# Altium PCB vfd_power_v0.PcbDoc
Units mil, origin at the board's own origin, x right, y up, seen from the top; angles counter-clockwise.
Board outline 7500 x 4000 mil, 2 copper layers (Top Layer, Bottom Layer); 84 components, 41 nets, 235 pads, 22 vias.
Unrouted connection lines stored in the file: 44.
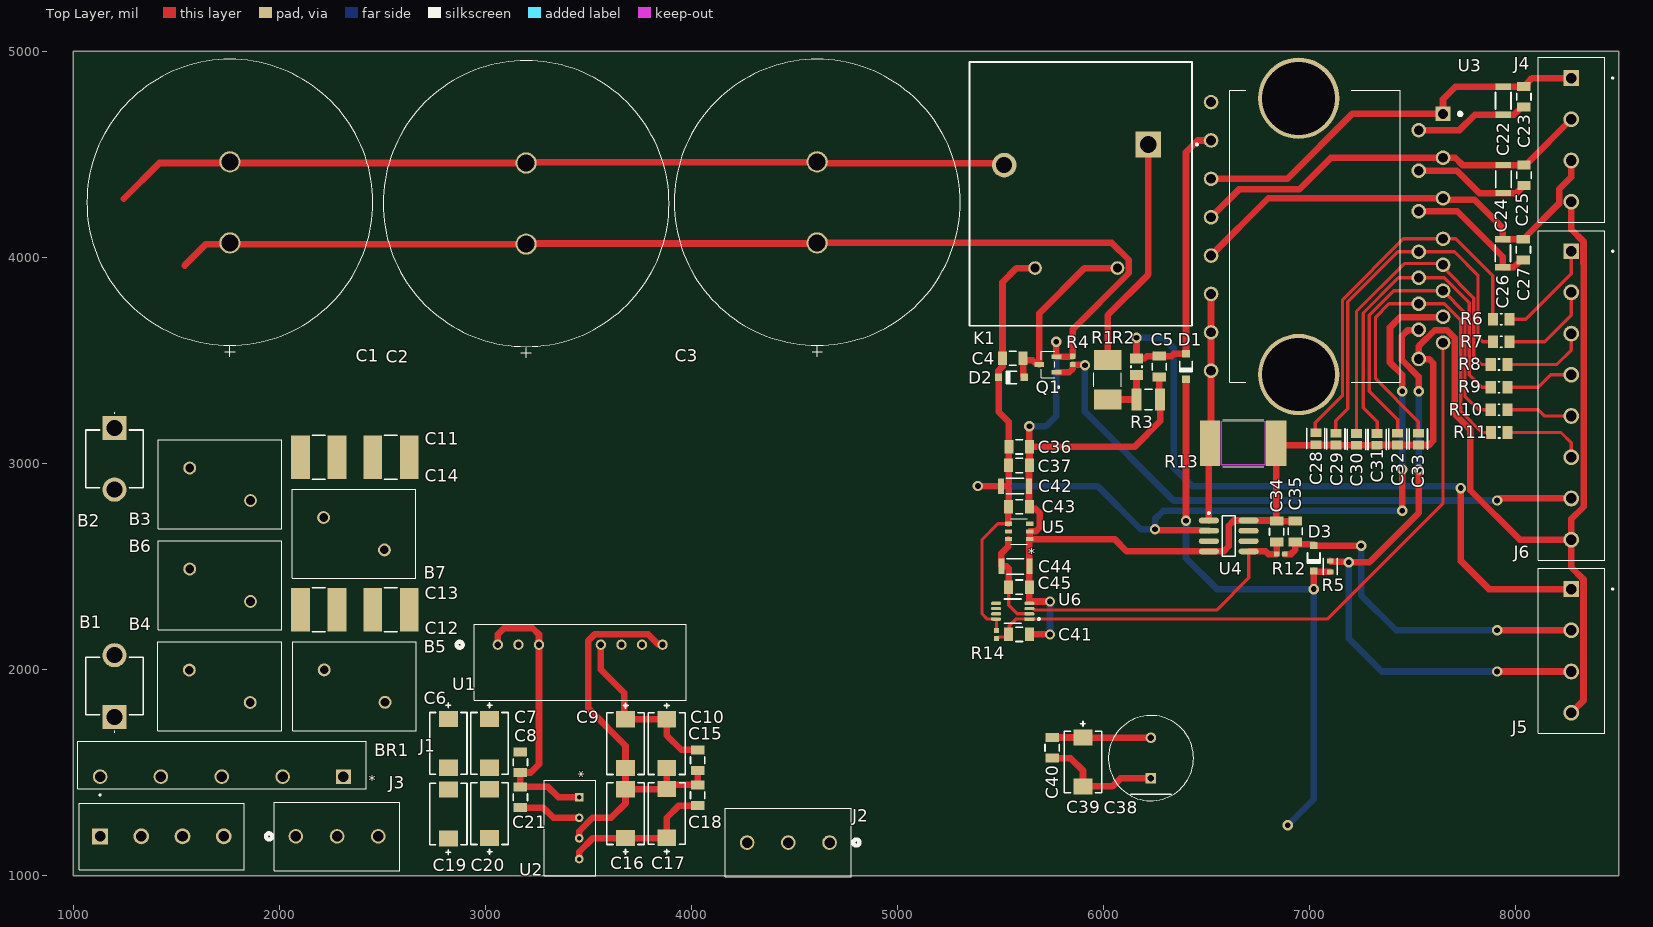
[diagram p0: Top Layer view]
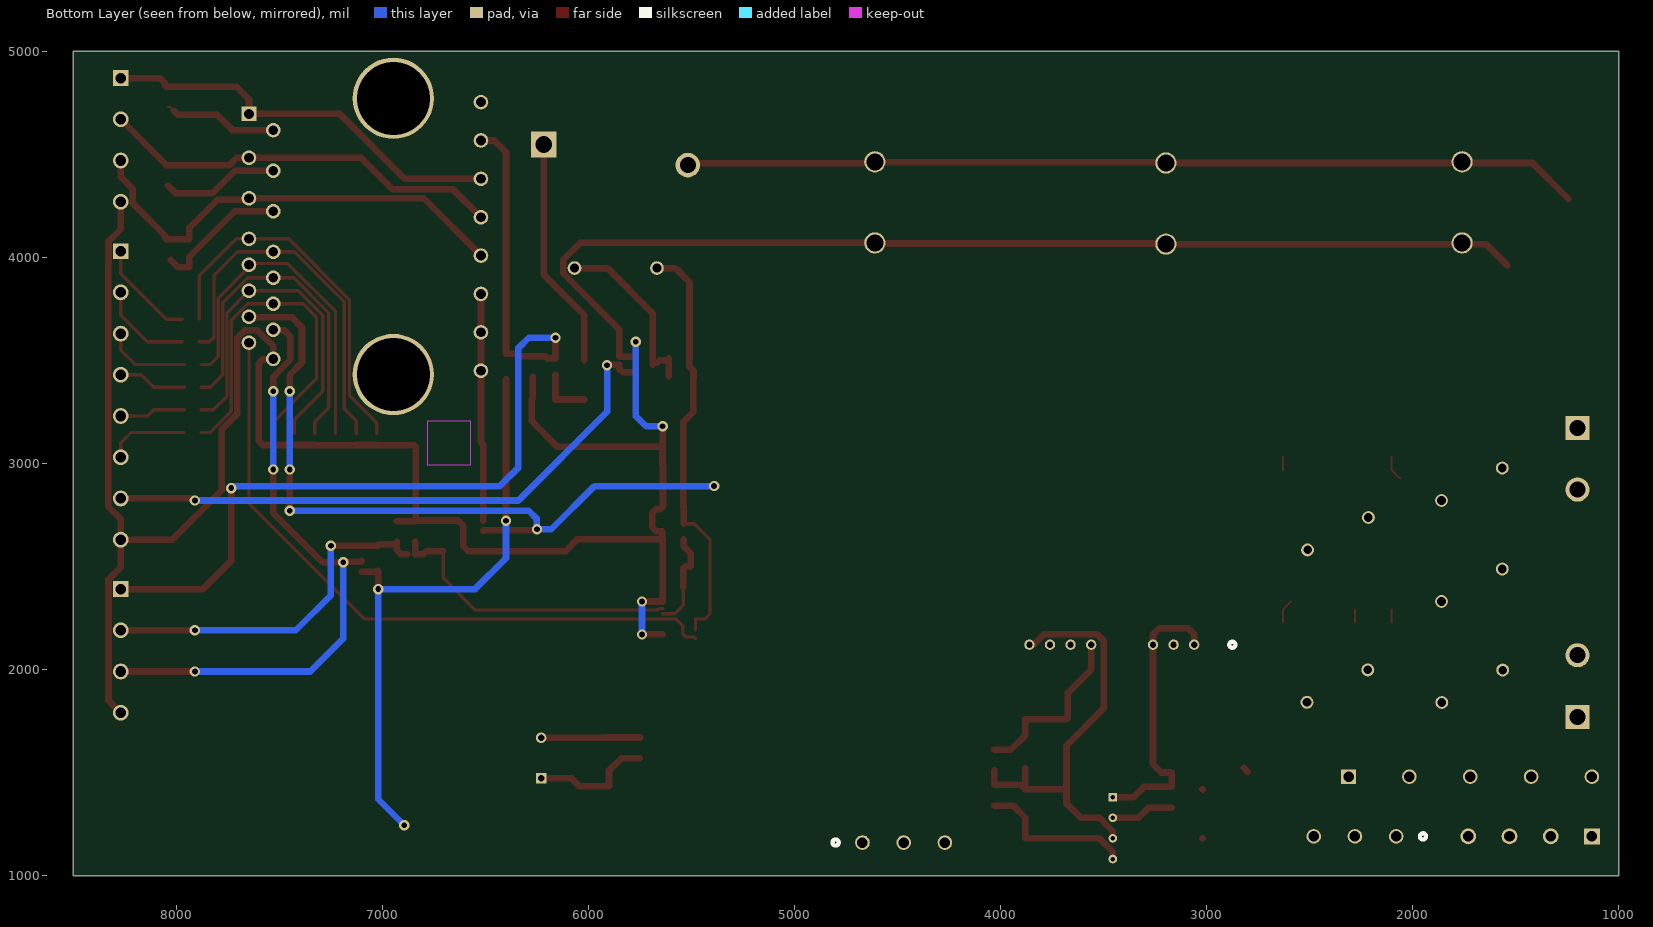
[diagram p1: Bottom Layer view, seen from below]
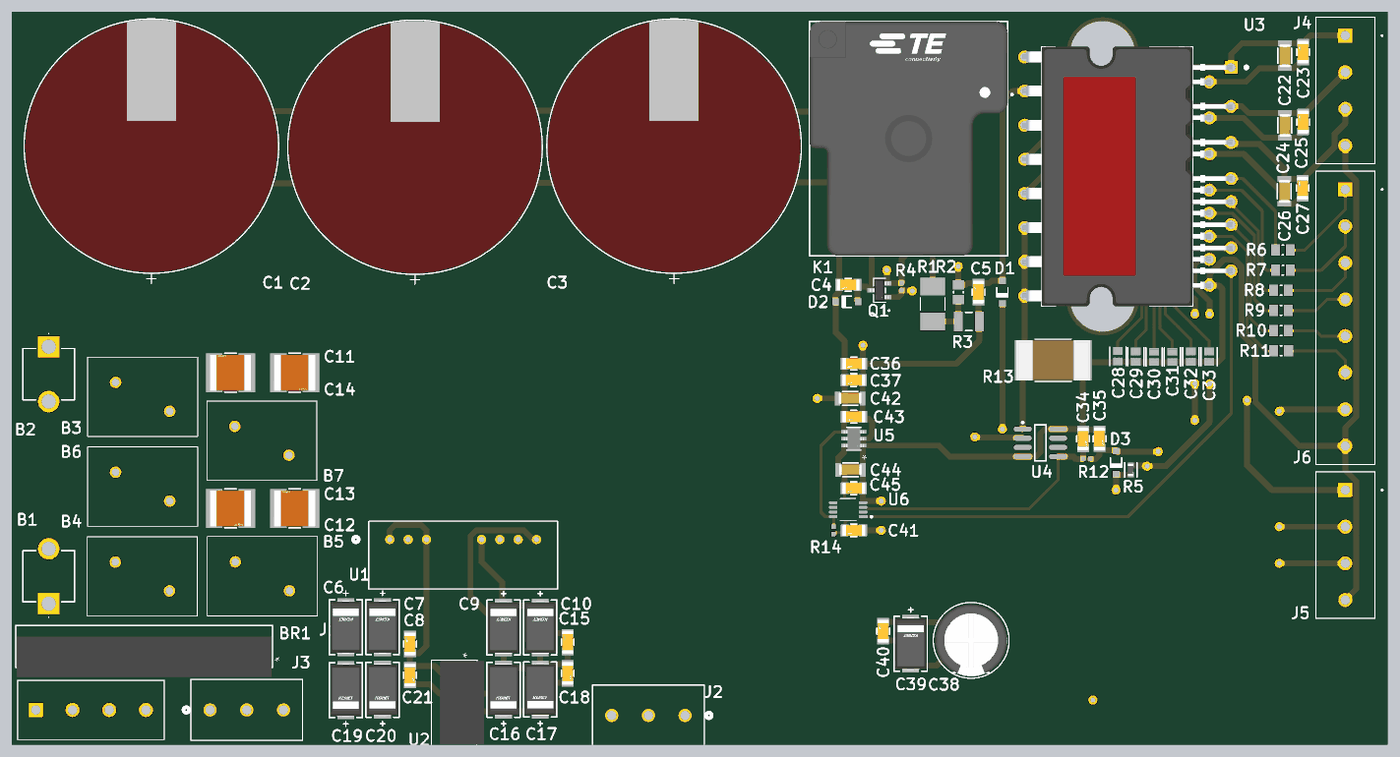
[diagram p2: 3D render of the assembled board from above, using the file's embedded part models]

## Layer stack, top to bottom
Top Solder: solder mask 0.4, Solder Resist, Dk 3.5
Top Layer: signal copper 1.4
Dielectric 1: dielectric 12.6, FR-4, Dk 4.8
Bottom Layer: signal copper 1.4
Bottom Solder: solder mask 0.4, Solder Resist, Dk 3.5

## Board outline
1000,1000 1000,5000 8500,5000 8500,1000

## Design rules (kind name [scope] priority, off if disabled: settings)
Clearance [All] p1: gap=5 ignorepadtopadclearanceinfootprint=FALSE
ComponentClearance [All] p1 off: gap=10 collisioncheckmode=3 verticalgap=10 showdistances=FALSE
DiffPairsRouting [All] p1: maxlimit=13 minlimit=13 mostfreqgap=13 toplayer_minwidth=7.42 toplayer_maxwidth=13 toplayer_prefwidth=7.42 bottomlayer_minwidth=7.42 bottomlayer_maxwidth=13 bottomlayer_prefwidth=7.42 maxuncoupledlength=500
FabricationTestPointUsage TestPointUsage [All] p1: valid=0 allowmultiple=FALSE
FabricationTestpoint Testpoint [All] p1: side=3 testpointundercomponent=TRUE minsize=40 maxsize=100 preferedsize=60 minholesize=20 maxholesize=40 preferedholesize=32 testpointgrid=1 allowsidetop=TRUE allowsidebottom=TRUE usegrid=TRUE gridtolerance=0.01
Height [All] p1 off: minheight=0 maxheight=1000 prefheight=500
HoleSize [All] p1: absolutevalues=TRUE maxlimit=800 minlimit=10 maxpercent=80.000 minpercent=20.000
MatchedLengths MatchedLengths_I210Rx [InNetClass('I210Rx')] p1: tolerance=5 checknetsindiffpair=FALSE checkdiffpairvsdiffpair=TRUE checkxsignals=TRUE checkothers=TRUE
MatchedLengths MatchedLengths_I210Tx [InNetClass('I210Tx')] p2: tolerance=5 checknetsindiffpair=FALSE checkdiffpairvsdiffpair=TRUE checkxsignals=TRUE checkothers=TRUE
MatchedLengths MatchedLengths_mSATARx [InNetClass('mSATARx')] p3: tolerance=25 checknetsindiffpair=FALSE checkdiffpairvsdiffpair=TRUE checkxsignals=TRUE checkothers=TRUE
MatchedLengths MatchedLengths_mSATATx [InNetClass('mSATATx')] p4: tolerance=25 checknetsindiffpair=FALSE checkdiffpairvsdiffpair=TRUE checkxsignals=TRUE checkothers=TRUE
MatchedLengths MatchedLengths_PCIECLK [InNetClass('PCIECLK')] p5: tolerance=25 checknetsindiffpair=FALSE checkdiffpairvsdiffpair=TRUE checkxsignals=TRUE checkothers=TRUE
MatchedLengths MatchedLengths_PCIETx [InNetClass('PCIETx')] p6: tolerance=5 checknetsindiffpair=FALSE checkdiffpairvsdiffpair=TRUE checkxsignals=TRUE checkothers=TRUE
MatchedLengths MatchedLengths_PCIERx [InNetClass('PCIERx')] p7: tolerance=5 checknetsindiffpair=FALSE checkdiffpairvsdiffpair=TRUE checkxsignals=TRUE checkothers=TRUE
MinimumSolderMaskSliver [All] p1: minsoldermaskwidth=5
PlaneConnect [All] p1: planeconnectstyle=Relief reliefexpansion=20 reliefentries=4 reliefconductorwidth=15 reliefairgap=10
PolygonConnect [All] p1: connectstyle=Direct reliefconductorwidth=20 reliefentries=4 polygonreliefangle="90 Angle" airgapwidth=30
RoutingVias [All] p1: holewidth=20 width=40 viastyle="Through Hole" minholewidth=15 minwidth=35 maxholewidth=28 maxwidth=50
SilkToSilkClearance [All] p1: silktosilkclearance=5
SilkToSolderMaskClearance SilkscreenOverComponentPads [IsPad] p1: minsilkscreentomaskgap=5 clearancetoexposedcopper=TRUE
SolderMaskExpansion [All] p1: expansion=4 istentingtop=FALSE
SupplyNets "Schematic Supply Nets_7" [InNet('PGND')] p1: voltage=0.000
SupplyNets "Schematic Supply Nets_6" [InNet('EGND')] p2: voltage=0.000
SupplyNets "Schematic Supply Nets_5" [InNet('15V')] p3: voltage=0.000
SupplyNets "Schematic Supply Nets_1" [InNet('3.3V')] p4: voltage=0.000
SupplyNets "Schematic Supply Nets_3" [InNet('ISO_5V')] p5: voltage=0.000
SupplyNets "Schematic Supply Nets_2" [InNet('ISO_15V')] p6: voltage=0.000
SupplyNets "Schematic Supply Nets" [InNet('GND')] p7: voltage=0.000
Width [All] p1: maxlimit=500 minlimit=5 preferedwidth=10
20 further rules are at their usual default settings.

## Components (designator, comment, footprint, x,y, rotation, side; value= is the part's Value field where it differs from the comment)
B1 "FCLIP1" 01240061H 1200,1770 r90 top
B2 "FCLIP2" 01240061H 1200,3172 r270 top
B3 "470 V" TMOV14RP300E 1712.36,2820 r180 top
B4 "470 V" TMOV14RP300E 1712.36,2487.48 r0 top
B5 "470 V" TMOV14RP300E 2365.16,1997.89 r0 top
B6 "470 V" TMOV14RP300E 1710.64,1839.61 r180 top
B7 "470 V" TMOV14RP300E 2362.36,2580 r180 top
BR1 "GUO40-12NO1" SIP5-GUFP_LTF 2311.1,1480 r180 top
C1 "330 µF" CAP_C30_NCH 1760,4070 r90 top
C2 "330 µF" CAP_C30_NCH 3197.52,4064.19 r90 top
C3 "330 µF" CAP_C30_NCH 4610,4070 r90 top
C4 "0.1 µF" FP-CL31-IPC_C 5559.75,3510 r180 top
C5 "0.1 µF" FP-CL31-IPC_C 6270,3470 r90 top
C6 "47 µF" FP-T521X476M035ATE030-MFG 2820,1641.5 r90 top
C7 "47 µF" FP-T521X476M035ATE030-MFG 3020,1641.5 r90 top
C8 "0.1 µF" FP-CL31-IPC_C 3170,1550 r90 top
C9 "47 µF" FP-T521X476M035ATE030-MFG 3680,1640 r90 top
C10 "47 µF" FP-T521X476M035ATE030-MFG 3880,1640 r90 top
C11 "0.01 µF" FP-GRM55D-0_4-IPC_B 2191.4,3030 r180 top
C12 "0.01 µF" FP-GRM55D-0_4-IPC_B 2541.4,2290 r180 top
C13 "0.01 µF" FP-GRM55D-0_4-IPC_B 2191.4,2290 r0 top
C14 "0.01 µF" FP-GRM55D-0_4-IPC_B 2541.4,3030 r0 top
C15 "0.1 µF" FP-CL31-IPC_C 4030,1559.75 r90 top
C16 "47 µF" FP-T521X476M035ATE030-MFG 3680,1300 r270 top
C17 "47 µF" FP-T521X476M035ATE030-MFG 3880,1301.5 r270 top
C18 "0.1 µF" FP-CL31-IPC_C 4030,1389.75 r270 top
C19 "47 µF" FP-T521X476M035ATE030-MFG 2820,1298.5 r270 top
C20 "47 µF" FP-T521X476M035ATE030-MFG 3020,1300 r270 top
C21 "0.1 µF" FP-CL31-IPC_C 3170,1380 r270 top
C22 "10 µF" FP-CGA5L-0_3-0_1-IPC_B 7939.68,4760 r270 top
C23 "0.1 µF" FP-CL31-IPC_C 8039.68,4779.75 r90 top
C24 "10 µF" FP-CGA5L-0_3-0_1-IPC_B 7940.31,4380 r270 top
C25 "0.1 µF" FP-CL31-IPC_C 8040.31,4397.91 r90 top
C26 "10 µF" FP-CGA5L-0_3-0_1-IPC_B 7937.52,4019.97 r270 top
C27 "0.1 µF" FP-CL31-IPC_C 8037.52,4037.64 r90 top
C28 "CL21C470JBANNND" FP-CL21-IPC_C 7030,3120 r270 top
C29 "CL21C470JBANNND" FP-CL21-IPC_C 7127.52,3117.89 r270 top
C30 "CL21C470JBANNND" FP-CL21-IPC_C 7227.52,3116.46 r270 top
C31 "CL21C470JBANNND" FP-CL21-IPC_C 7327.52,3116.46 r270 top
C32 "CL21C470JBANNND" FP-CL21-IPC_C 7427.52,3117.89 r270 top
C33 "CL21C470JBANNND" FP-CL21-IPC_C 7527.52,3117.89 r270 top
C34 "0.1 µF" FP-CL31-IPC_C 6840,2669.5 r270 top
C35 "0.1 µF" FP-CL31-IPC_C 6930,2669.75 r270 top
C36 "0.1 µF" FP-CL31-IPC_C 5590.25,3080 r180 top
C37 "0.1 µF" FP-CL31-IPC_C 5589.75,2990 r180 top
C38 "220 µF" FP-RAD-TH-D_10_0_5-L_16_1-MFG 6230,1569.68 r90 top
C39 "47 µF" FP-T521X476M035ATE030-MFG 5900,1551.18 r90 top
C40 "0.1 µF" FP-CL31-IPC_C 5750,1619.68 r90 top
C41 "0.1 µF" FP-CL31-IPC_C 5590,2170 r180 top
C42 "10 µF" FP-CGA5L-0_3-0_1-IPC_B 5570,2890 r0 top
C43 "0.1 µF" FP-CL31-IPC_C 5590,2790 r180 top
C44 "10 µF" FP-CGA5L-0_3-0_1-IPC_B 5572.09,2500 r0 top
C45 "0.1 µF" FP-CL31-IPC_C 5589.75,2400 r180 top
D1 "1N4148W-7-F" DIOD-SOD123-2_V 6400,3470 r270 top
D2 "1N4148W-7-F" DIOD-SOD123-2_V 5552.5,3417.5 r180 top
D3 "1N4148W-7-F" DIOD-SOD123-2_V 7020,2540 r270 top
J1 "TB006_-508-04BE" "CUI_TB006 -508-04BE" 1130,1190 r0 top
J2 "TB006-508-03BE" CONN3_TB006-508_CUD 4670,1160 r180 top
J3 "TB006-508-03BE" CONN3_TB006-508_CUD 2080,1190 r0 top
J4 "TB006_-508-04BE" "CUI_TB006 -508-04BE" 8270,4870 r270 top
J5 "TB006_-508-04BE" "CUI_TB006 -508-04BE" 8270,2390 r270 top
J6 "TB006_-508-08BE" "CUI_TB006 -508-08BE" 8270,4030 r270 top
K1 "T9AS1D12-15" FP-T9AS1D12-15-MFG 5889.37,4307.93 r0 top
Q1 "2N7002-TP" SOT-23_MCC 5730,3480 r90 top
R1 "CRS2512-FX-1004ELF" RESC6432X75N 6020,3405.47 r90 top
R2 "1 kΩ" RESC2013X60X30ML20T20 6160,3469.65 r90 top
R3 "10 kΩ" RESC3225X60X45NL20T20 6217.09,3310 r180 top
R4 "10 kΩ" RESC1005X40X25ML05T05 5850,3500 r270 top
R5 "82 kΩ" FP-RC0603-0_55-IPC_C 7100,2500 r270 top
R6 "22 Ω" RESC2013X60X30ML20T20 7929.65,3700 r180 top
R7 "22 Ω" RESC2013X60X30ML20T20 7929.65,3590 r180 top
R8 "22 Ω" RESC2013X60X30ML20T20 7919.65,3480 r180 top
R9 "22 Ω" RESC2013X60X30ML20T20 7919.65,3370 r180 top
R10 "22 Ω" RESC2013X60X30ML20T20 7919.65,3260 r180 top
R11 "22 Ω" RESC2013X60X30ML20T20 7920,3150 r180 top
R12 "10 kΩ" RESC1005X40X25ML05T05 6860,2560 r0 top
R13 "2.5 mΩ" RES_WSLP3921_.002OHM_VIS 6677.52,3097.89 r180 top
R14 "10 kΩ" RESC1005X40X25ML05T05 5480,2169.68 r90 top
U1 "TMR 2-2413WI" TMR2WI-SINGLE_TRP 3060,2120 r0 top
U2 "NKE0305SC" SIP_NKE_11P5X6_MUR 3455,1380 r270 top
U3 "IKCM30F60GDXKMA1" IC_IKCM30F60GDXKMA1 7084.53,4101.67 r270 top
U4 "MAX4080SASA+T" MAXM-S8+2_M 6607.52,2647.89 r0 top
U5 "LT6654BHS6-1.25TRMPBF" TSOT-23_S6_LIT 5590,2670 r180 top
U6 "TLV1702AIDGKR" FP-DGK0008A-IPC_C 5559.26,2282.8 r180 top

## Footprints (in the part's own frame and the unit in brackets; to place one, negate y for a bottom-side part, rotate by r counter-clockwise, add the part's x,y. Pads: shape width x height; smd on the part's side, far side on the other; paste and mask are expansions set on the pad)
01240061H [mm]
  rect 2.97x2.97 hole 1.98: 1(0,0)
  round 2.97 hole 1.98: 2(7.6,0)
  silkscreen extent -1.9,-3.55 7.36,3.55
CAP_C30_NCH [mil]
  round 103 / inner round 60 / far side round 103 hole 83 paste-99999 mask+0: 1(0,0) 2(393.7,0)
  silkscreen extent -552,-694 891,694, body extent -492,-688 887,688, height 1261
CONN3_TB006-508_CUD [mil]
  round 71 / inner round 60 / far side round 71 hole 51 paste-99999 mask+0: 1(0,0) 2(200,0) 3(400,0)
  silkscreen extent -145,-167 505,166
"CUI_TB006 -508-04BE" [mm]
  rect 1.95x1.95 / inner round 1.95 / far side rect 1.95x1.95 hole 1.3: 1(0,0)
  round 1.95 hole 1.3: 2(5.08,0) 3(10.16,0) 4(15.24,0)
  silkscreen extent -2.54,-4.1 17.78,5.2
"CUI_TB006 -508-08BE" [mm]
  rect 1.95x1.95 / inner round 1.95 / far side rect 1.95x1.95 hole 1.3: 1(0,0)
  round 1.95 hole 1.3: 2(5.08,0) 3(10.16,0) 4(15.24,0) 5(20.32,0) 6(25.4,0) 7(30.48,0) 8(35.56,0)
  silkscreen extent -2.54,-4.1 38.1,5.2
DIOD-SOD123-2_V [mm] "SOD123, 2-Leads, Body 2.7x1.55mm, Height 1.45mm"
  rect 0.9x0.95 smd: 1(-1.575,0) 2(1.575,0)
  silkscreen extent -0.64,-0.83 0.64,0.78, body extent -1.35,-0.77 1.35,0.77, height 1.45
FP-CGA5L-0_3-0_1-IPC_B [mm]
  rect 0.756x1.906 smd paste+0 mask+0: 1(-1.725,0) 2(1.725,0)
  silkscreen extent -1.05,-0.95 1.05,0.95, body extent -2.35,-1.2 2.35,1.2, height 0.25
FP-CL21-IPC_C [mil]
  rect 41.52x53.39 smd paste+0 mask+0: 1(-28.57,0) 2(28.57,0)
  silkscreen extent -49,-44 49,44, body extent -53,-32 53,32, height 10
FP-CL31-IPC_C [mil]
  rect 43.52x65.28 smd paste+0 mask+0: 1(-50.25,0) 2(50.25,0)
  silkscreen extent -17,-34 17,34, body extent -76,-38 76,38, height 10
FP-DGK0008A-IPC_C [mm]
  rect 1.257x0.418 smd paste+0 mask+0: 1(-2.051,0.975)
  rrect100% 1.257x0.418 smd paste+0 mask+0: 2(-2.051,0.325) 3(-2.051,-0.325) 4(-2.051,-0.975) 5(2.051,-0.975) 6(2.051,-0.325) 7(2.051,0.325) 8(2.051,0.975)
  silkscreen extent -3.35,-1.5 1.05,1.5, body extent -2.78,-1.6 2.78,1.6, height 0.25
FP-GRM55D-0_4-IPC_B [mil]
  rect 90.64x212.72 smd paste+0 mask+0: 1(-88.6,0) 2(88.6,0)
  silkscreen extent -31,-106 31,106, body extent -144,-116 144,116, height 10
FP-RAD-TH-D_10_0_5-L_16_1-MFG [mm]
  rect 1.3x1.3 hole 0.8 paste-2539.97 mask+0: 1(-2.5,0)
  round 1.3 hole 0.8 paste-2539.97 mask+0: 2(2.5,0)
  silkscreen extent -5.25,-5.25 5.25,5.25, body extent -5.35,-5.35 5.35,5.35, height 0.25
FP-RC0603-0_55-IPC_C [mil]
  rect 25.93x31.97 smd paste+0 mask+0: 1(-26.64,0) 2(26.64,0)
  silkscreen extent -40,-33 40,33, body extent -44,-22 44,22, height 10
FP-T9AS1D12-15-MFG [mm]
  rect 3.16x3.16 hole 2.06 paste-2539.97 mask+0: 1(8.335,6.095)
  round 3.03 hole 1.98 paste-2539.97 mask+0: 2(-9.445,3.555)
  round 1.69 hole 1.09 paste-2539.97 mask+0: 3(-5.635,-9.145) 4(4.525,-9.145)
  silkscreen extent -13.71,-16.25 14.44,16.25, body extent -13.81,-16.35 13.81,16.35, height 0.25
FP-T521X476M035ATE030-MFG [mm]
  rect 1.99x2.33 smd paste+0 mask+0: 1(-3.01,0) 2(3.01,0)
  silkscreen extent -3.8,-2.3 5,2.3, body extent -4.13,-2.42 4.13,2.42, height 0.25
IC_IKCM30F60GDXKMA1 [mm]
  rect 1.8x1.8 / inner round 1.8 / far side rect 1.8x1.8 hole 1.2: 1(-15.1,14.3)
  round 1.8 hole 1.2: 2(-13.1,11.3) 3(-9.7,14.3) 4(-8.1,11.3) 5(-4.7,14.3) 6(-3.1,11.3) 7(0.3,14.3) 8(1.9,11.3) 9(3.5,14.3) 10(5.1,11.3) 11(6.7,14.3) 12(8.3,11.3) 13(9.9,14.3) 14(11.5,11.3) 15(13.1,14.3) 16(15.1,11.3) 17(16.555,-14.3) 18(11.825,-14.3) 19(7.095,-14.3) 20(2.365,-14.3) 21(-2.365,-14.3) 22(-7.095,-14.3) 23(-11.825,-14.3) 24(-16.555,-14.3)
  round 10.016 hole 9 mask+0: 25(-17.025,-3.5) 26(17.025,-3.5)
  silkscreen extent -18,-12 18,16.6, body extent -18,-14.55 18,14.55, height 5.6
MAXM-S8+2_M [mm] "SOIC, 8-Leads, Body 4.90x3.90mm, Pitch 1.27mm, IPC Low Density"
  oval 2.5x0.7 smd: 1(-2.45,1.905) 2(-2.45,0.635) 3(-2.45,-0.635) 4(-2.45,-1.905) 5(2.45,-1.905) 6(2.45,-0.635) 7(2.45,0.635) 8(2.45,1.905)
  silkscreen extent -2.57,-2.5 0.8,2.93, body extent -2,-2.5 2,2.5, height 1.75
RES_WSLP3921_.002OHM_VIS [mil]
  rect 98x220 smd paste+0 mask+0: 1(-161,0) 2(161,0)
  Top Layer keep-out region: -107,-106 -107,106 105,106 105,-106
  Keep-Out Layer region: -105.5,-105.5 -105.5,105.5 105.5,105.5 105.5,-105.5
  silkscreen extent -100,-115 100,115, body extent -202,-110 202,110, height 47
RESC1005X40X25ML05T05 [mm] "Chip Resistor, 2-Leads, Body 1.00x0.50mm, IPC Low Density"
  rect 0.65x0.65 smd: 1(-0.5,0) 2(0.5,0)
  body extent -0.53,-0.27 0.53,0.28, height 0.4
RESC2013X60X30ML20T20 [mm] "Chip Resistor, 2-Leads, Body 2.00x1.25mm, IPC Low Density"
  rect 1.25x1.55 smd: 1(-1.025,0) 2(1.025,0)
  silkscreen extent -0.1,-0.67 0.1,0.67, body extent -1.1,-0.72 1.1,0.72, height 0.6
RESC3225X60X45NL20T20 [mm] "Chip Resistor, 2-Leads, Body 3.20x2.50mm, IPC Medium Density"
  rect 1.2x2.7 smd: 1(-1.45,0) 2(1.45,0)
  silkscreen extent -0.45,-1.25 0.45,1.25, body extent -1.7,-1.35 1.7,1.35, height 0.6
RESC6432X75N [mm]
  rect 2.46x3.42 smd: 1(-2.425,0) 2(2.425,0)
  silkscreen extent -0.87,-1.7 0.87,1.7
SIP5-GUFP_LTF [mil]
  rect 71x71 / inner round 60 / far side rect 71x71 hole 51 paste-99999 mask+0: 1(0,0)
  round 71 / inner round 60 / far side round 71 hole 51 paste-99999 mask+0: 2(295.28,0) 3(590.55,0) 4(885.83,0) 5(1181.1,0)
  silkscreen extent -109,-171 1291,59, body extent -104,-110 1286,110, height 1142
SIP_NKE_11P5X6_MUR [mil]
  rect 42x42 / inner round 60 / far side rect 42x42 hole 22 paste-99999 mask+0: 1(0,0)
  round 42 / inner round 60 / far side round 42 hole 22 paste-99999 mask+0: 2(100,0) 3(200,0) 4(300,0)
  silkscreen extent -82,-168 382,82, body extent -77,-120 377,120, height 304
SOT-23_MCC [mil]
  rect 22x48 smd paste+0 mask+0: 1(-37.5,-42) 2(37.5,-42) 3(0,42)
  silkscreen extent -115,-57 65,33, body extent -60,-52 60,52, height 49
TMOV14RP300E [mm]
  round 1.59 hole 1.06: 1(-3.75,0) 2(3.75,-4)
  silkscreen extent -7.62,-7.5 7.62,3.5
TMR2WI-SINGLE_TRP [mil]
  round 50 / inner round 60 / far side round 50 hole 30 paste-99999 mask+0: 1(0,0) 2(100,0) 3(200,0) 6(500,0) 7(600,0) 8(700,0) 9(800,0)
  silkscreen extent -200,-270 915,100
TSOT-23_S6_LIT [mil]
  rect 34.5x20 smd paste+0 mask+0: 1(-51.75,37.4) 2(-51.75,0) 3(-51.75,-37.4) 4(51.75,-37.4) 5(51.75,0) 6(51.75,37.4)
  silkscreen extent -40,-62 40,62, body extent -55,-57 55,57, height 39

## Part data
B1 B2: library part 01240061H, "Fuse Clip 40 A - 1 Circuit Cartridge Through Hole", Manufacturer_Name=LITTELFUSE, Mouser Part Number=576-01240061H, Datasheet Link=https://www.littelfuse.com/media?resourcetype=datasheets&itemid=281b065a-d81e-4e26-9035-84e73d4bb028&filename=littelfuse-fuse-clip-124-datasheet.pdf, Geometry.Height=10.67mm, Manufacturer_Part_Number=01240061H, Mouser Price/Stock=https://www.mouser.co.uk/ProductDetail/Littelfuse/01240061H?qs=81r%252BiQLm7BSgqEC6g%252BUS9Q%3D%3D
B3 B4 B5 B6 B7: library part TMOV14RP300E, "Var MOV 300VAC/385VDC 6000A 517V Thru-Hole Radial Bulk", Manufacturer_Name=LITTELFUSE, Mouser Part Number=576-TMOV14RP300E, Datasheet Link=https://www.littelfuse.com/~/media/electronics/datasheets/varistors/littelfuse_varistor_tmov_itmov_datasheet.pdf.pdf, Geometry.Height=22mm, Manufacturer_Part_Number=TMOV14RP300E, Mouser Price/Stock=https://www.mouser.co.uk/ProductDetail/Littelfuse/TMOV14RP300E?qs=nXjUL3qLHyUFvQrdNOF75Q%3D%3D
BR1: "No Description Available", Mfr_Name="Littelfuse Inc", RefDes=RefDes, Type=Type
C1 C2 C3: library part LGW2G331MELC30, "400V", Mfr_Name=Nichicon
C4 C5 C8 C15 C18 C21 C23 C25 C27 C34 C35 C36 C37 C40 C41 C43 C45: library part CMP-13271-001731-1, "Cap Ceramic 100nF 50V X7R ±10% SMD 1206 +125°C Embossed T/R", Capacitance=100nF, Case/Package=1206, Dielectric=X7R, Max Operating Temperature=125°C, Min Operating Temperature=-55°C, Package Quantity=15000, Tolerance=10%, Voltage=50V, Depth=1.6mm, Height=0.85mm, Lead Free="Lead Free", Length=3.2mm, Mount="Surface Mount", Packaging="Tape and Reel", Radiation Hardening=No, Thickness=0.037inch, Voltage Rating=50V, Voltage Rating (DC)=50V, Width=0.063inch
C6 C7 C9 C10 C16 C17 C19 C20 C39: library part CMP-03016-000019-1, "CAP TANT POLY 47UF 35V 2917 /  / 35V", Capacitance=47uF, Case Code (Imperial)=2917, Case Code (Metric)=7343, ESR (Equivalent Series Resistance)=30mR, Max Operating Temperature=125°C, Min Operating Temperature=-55°C, Package Quantity=1, Tolerance=20%, Voltage Rating=35V, Case/Package=2917, Construction=Flat, Depth=4.3mm, Dissipation Factor=10%, Features="General Purpose", Height=4mm, Height - Seated (Max)=0.169inch, Length=7.3mm, Life (Hours)=2000Hour, Mount="Surface Mount", Number of Pins=2, Packaging="Tape and Reel", Polarity=Polar, REACH SVHC="No SVHC", RoHS Compliant=Yes, Series="KO-CAP T521", Termination=SMD/SMT, Voltage Rating (DC)=35V, Width=4.3mm
C11 C12 C13 C14: library part CMP-06035-012355-1, "Chip Multilayer Ceramic Capacitors for General Purpose, 2220, 10000pF, U2J, -750ppm/°C, 5%, 1kV", Capacitance=10nF, Case Code (Imperial)=2220, Case Code (Metric)=5750, Dielectric=U2J, Max Operating Temperature=125°C, Min Operating Temperature=-55°C, Package Quantity=1000, Tolerance=5%, Voltage Rating=1kV, Case/Package=2220, Height=2mm, Length=0.224inch, Mount="Surface Mount", Packaging="Tape and Reel", Termination=SMD/SMT, Thickness=0.087inch, Voltage Rating (DC)=1kV, Width=0.197inch
C22 C24 C26 C42 C44: library part CMP-08246-000748-1, "Cap Ceramic 10uF 25V X7R 10% Pad SMD 1206 +125°C Automotive T/R", Capacitance=10uF, Case Code (Imperial)=1206, Case Code (Metric)=3216, Dielectric=X7R, Max Operating Temperature=125°C, Min Operating Temperature=-55°C, Package Quantity=2000, Ratings=AEC-Q200, Tolerance=10%, Voltage Rating=25V, Case/Package=1206, Composition=Ceramic, Depth=1.6mm, Height=1.6mm, Length=3.2mm, Mount="Surface Mount", Packaging="Tape and Reel", Termination=SMD/SMT, Thickness=0.071inch, Voltage Rating (DC)=25V, Weight=0.000571oz, Width=1.6mm
C28 C29 C30 C31 C32 C33: library part CMP-13271-002187-1, "CL21 Series 0805 47pF 50V ±5% Tolerance C0G Multilayer Ceramic Chip Capacitor", Capacitance=47pF, Case/Package=0805, Dielectric=C0G, Max Operating Temperature=125°C, Min Operating Temperature=-55°C, Package Quantity=10000, Temperature Coefficient=300ppm/°C, Tolerance=5%, Voltage=50V, Depth=1.25mm, Height=0.65mm, Length=2mm, Material=Ceramic, Mount="Surface Mount", Packaging="Tape and Reel", Radiation Hardening=No, Thickness=0.03inch, Voltage Rating=50V, Voltage Rating (DC)=50V, Width=0.049inch
C38: library part CMP-05427-000403-1, "Aluminum Electrolytic Capacitors (Radial Lead Type) 220uF ±20% 50V", Capacitance=220uF, Case/Package=Radial, ESR (Equivalent Series Resistance)=30mR, Max Operating Temperature=105°C, Min Operating Temperature=-40°C, Package Quantity=1, Ripple Current=1.65A, Tolerance=20%, Voltage Rating=50V, Contact Plating=Tin, Diameter=10mm, Features="General Purpose", Height=16mm, Height - Seated (Max)=0.689inch, Impedance=30mR, Lead Diameter=0.6mm, Lead Free="Lead Free", Lead Pitch=5mm, Length=16mm, Life (Hours)=8000Hour, Mount="Through Hole", Number of Pins=2, Packaging="Ammo Pack", Radiation Hardening=No, REACH SVHC="No SVHC", RoHS Compliant=Yes, Series=FR, Termination=Radial, Voltage Rating (DC)=50V
D1 D2 D3: library part CMP-2000-04932-2, "Fast Switching Diode, 100 V, 0.15 A, -65 to 150 degC, 2-Pin?SOD123, RoHS, Tape and Reel", If - Forward Current=0.15A, Ir - Reverse Current=1uA, Manufacturer=DiodesIncorporated, Max Surge Current=2A, Maximum Operating Temperature=+150C, Minimum Operating Temperature=-65C, Operating Temperature Range=-65Cto+150C, Package / Case=SOD-123, Package Reference=SOD123-2, Peak Reverse Voltage=100V, Vf - Forward Voltage=1.25V, Brand=DiodesIncorporated, Configuration=Single, Datasheet URL=http://www.farnell.com/datasheets/1915529.pdf, Datasheet Version="Rev. 24-2, 10/2013", Factory Pack Quantity=3000, Height=1.25mm, Length=2.85mm, Manufacturer URL=http://www.diodes.com/, Mounting Style=SMD/SMT, Package URL=http://www.diodes.com/datasheets/ds18004.pdf, Packaging=Reel, Product=SwitchingDiodes, Product Category=Diodes-GeneralPurpose,Power,Switching, Recovery Time=4ns, RoHS=True, Series=1N4148, Type=SwitchingDiode, Unit Weight=0.000353oz, Width=1.7mm
J1 J4 J5: "2~24 Poles, Screw Type, Horizontal, 5.08 Pitch, 26~14 (AWG), Terminal Block Connector", Package=None, Availability="In Stock", Check_prices=https://www.snapeda.com/parts/TB006%20-508-04BE/CUI+Devices/view-part/?ref=eda, CUI_purchase_URL=https://www.cuidevices.com/product/interconnect/connectors/terminal-blocks/tb006-508-series?utm_source=snapeda.com&utm_medium=referral&utm_campaign=snapedaBOM, MF="CUI Devices", MP="TB006 -508-04BE", Price=None, Purchase-URL="https://pricing.snapeda.com/search/part/TB006 -508-04BE/?ref=eda", SnapEDA_Link=https://www.snapeda.com/parts/TB006%20-508-04BE/CUI+Devices/view-part/?ref=snap
J2 J3: "No Description Available", Mfr_Name="Same Sky", RefDes=RefDes, Type="Wire to Board"
J6 R1: Package=None, Availability=Unavailable, Price=None
  J6: MF="{'manufacturer': u'CUI Devices'}", MP="TB006 -508-08BE"
  R1: MP=CRS2512-FX-1004ELF
K1: library part CMP-03395-000224-1, "RELAY GEN PURPOSE SPST 30A 15V", Coil Current=67mA, Coil Power=1W, Coil Resistance=225R, Coil Voltage (DC)=15V, Contact Current Rating=30A, Contact Voltage Rating (AC)=277V, Max Operating Temperature=85°C, Min Operating Temperature=-55°C, Package Quantity=50, Coil Type=Non-Latching, Contact Material=Silver, Depth=27.43mm, ELV=Non-Compliant, Height=20.4mm, Lead Free="Lead Free", Length=32.5mm, Max Voltage Rating (AC)=277V, Mount="Through Hole", Number of Pins=4, Operate Time=15ms, Packaging=Bulk, Power Consumption=1W, Radiation Hardening=No, Relay Type="General Purpose", Release Time=15ms, RoHS Compliant=Yes, Series=T9A, Termination=PCB, Throw Configuration=SPST, Weight=0.918oz, Width=27.4mm
Q1: "No Description Available", Mfr_Name=MCC, Type=Transistors
R2: library part CMP-2001-04656-1, "±5%", Manufacturer="KOA Speer", Part Number=RK73B2ATTD102J
R3: library part CMP-2005-01993-1, "±1%, 0.5W", Manufacturer="Vishay Dale", Part Number=CRCW121010K0FKEA
R4 R12 R14: library part CMP-2002-01181-1, "±5%", Manufacturer=Panasonic, Part Number=ERT-J0EM103J
R5: library part CMP-03412-048229-1, "RES 82K OHM 5% 1/10W 0603", Case Code (Imperial)=0603, Case Code (Metric)=1608, Max Operating Temperature=155°C, Max Power Dissipation=100mW, Min Operating Temperature=-55°C, Package Quantity=1, Resistance=82kR, Resistance Tolerance=5%, Resistor Type="Thick Film", Temperature Coefficient=100ppm/°C, Voltage Rating=75V, Voltage Rating (DC)=50V, Case/Package=0603, Construction=Rectangular, Depth=0.8mm, Features="Moisture Resistant", Height=0.022inch, Lead Free="Lead Free", Length=0.063inch, Military Standard=Not, Number of Pins=2, Number of Terminations=2, Packaging="Tape and Reel", Power Rating=100mW, REACH SVHC="No SVHC", RoHS Compliant=Yes, Series=RC, Size Code=0603, Termination=SMD/SMT, Tolerance=5%, Weight=7.1E-05oz, Width=0.8mm
R6 R7 R8 R9 R10 R11: library part CMP-2001-04578-1, Manufacturer="KOA Speer", Part Number=RK73B2ATTD220J
R13: library part WSLP39212L500FEA, "±1%, 5W", Mfr_Name=Vishay
U1: library part CMP-01539-55835505-1, "TMR 2-2413WI Module DC-DC 24VIN 1-OUT 15V 135A 2W 7-Pin SIP", Case/Package=SIP, Isolation Voltage=1.5kV, Max Operating Temperature=85°C, Min Operating Temperature=-40°C, Nominal Input Voltage=24V, Output Current=135A, Output Power=2W, Output Voltage=15V, Depth=9.3mm, Isolation=Isolated, Length=26mm, Mount="Through Hole", NexarPartId=55835505, Number of Outputs=1, Number of Pins=7, Radiation Hardening=No, RoHS=Compliant
U2: "No Description Available", Mfr_Name=Murata, RefDes=RefDes, Type=Type
U3: "Fully isolated Dual In-Line molded module", Package="PowerDIP-24 Infineon", Availability="In Stock", Check_prices=https://www.snapeda.com/parts/IKCM30F60GDXKMA1/Infineon+Technologies/view-part/?ref=eda, MF="Infineon Technologies", MP=IKCM30F60GDXKMA1, Price=None, Purchase-URL=https://pricing.snapeda.com/search?q=IKCM30F60GDXKMA1&ref=eda, SnapEDA_Link=https://www.snapeda.com/parts/IKCM30F60GDXKMA1/Infineon+Technologies/view-part/?ref=snap
U4: library part CMP-0252-00176-1, "76 V, High-Side, Uni-directional Current-Sense Amplifier, 60 V / V Gain, -40 to 125 degC, 8-Pin SOIC (S8+2), Pb-Free, Tape and Reel", Bi-Dir. Curr. Sense=No, Code_JEDEC=MS012, ComponentLink1Description="Manufacturer URL", ComponentLink1URL=http://www.maximintegrated.com/, ComponentLink2Description=Datasheet, ComponentLink2URL=http://datasheets.maximintegrated.com/en/ds/MAX4080-MAX4081.pdf, ComponentLink3Description="Package Specification", ComponentLink3URL=http://pdfserv.maximintegrated.com/package_dwgs/21-0041.PDF, DatasheetVersion="Rev. 4", Gain="5 V/V, 20 V/V ,60 V/V", Industry Qualified="Automotive - AECQ100, Automotive - General", Mounting Technology="Surface Mount", PackageDescription="8-Pin Small-Outline IC, Narrow (0.15in) (S8+2), Body 4.90 x 3.90 mm, Pitch 1.27 mm", PackageReference=S8+2, PackageVersion="Rev. D, 10/2012", PartNumber=MAX4080SASA+T
U5: "No Description Available", Mfr_Name="Analog Devices Inc", RefDes=RefDes, Type=Type
U6: library part CMP-04896-000101-1, "IC COMPARATOR DUAL 8VSSOP", Case/Package=VSSOP, Input Bias Current=15nA, Input Offset Voltage (Vos)=3.5mV, Max Dual Supply Voltage=18V, Max Operating Temperature=125°C, Max Supply Voltage=36V, Min Dual Supply Voltage=1.1V, Min Operating Temperature=-40°C, Min Supply Voltage=2.2V, Nominal Supply Current=55uA, Output Current=20mA, Package Quantity=2500, Power Supply Rejection Ratio (PSRR)=-96.48dB, Quiescent Current=75uA, Contact Plating=Gold, Lead Free="Lead Free", Max Input Current=15nA, Mount="Surface Mount", Number of Channels=2, Number of Elements=2, Number of Pins=8, Packaging="Tape and Reel", Propagation Delay=560ns, REACH SVHC="No SVHC", Response Time=780ns, RoHS Compliant=Yes, Series=-, Type="General Purpose"

## Via types
v1: diameter 50, hole 28, Top Layer to Bottom Layer, 22 vias

## Nets (pads, with @x,y where several pads share a name; then routed paths per layer and width w, separated by ;. In a path a pad name is that pad's centre, name@x,y a point inside that pad or via, vN(x,y) a via of type N, cw(c..) or ccw(c..) an arc to the next point about the centre after c; other vN are vias at no path point)
3.3V: C19.2 C20.2 C21.2 J3.1 U2.2 | length 307.7
  Top Layer w32: C20.2@3018.5,1180 C20.2 ; C21.2 3280.25,1329.75 3330,1280 U2.2
15V: C6.2 C7.2 C8.2 J3.3 U1.2
+_VIN: B1.1 BR1.5
EGND: B7.1 C14.2 | length 61
  Top Layer w10: C14.2@2630,2968.96 C14.2
GND: C6.1 C7.1 C8.1 C19.1 C20.1 C21.1 J3.2 U1.1 U1.3 U2.1 | length 1417.2
  Top Layer w32: C6.1@2800,1502.99 C6.1 ; C20.1@3018.5,1417.01 C20.1 ; U1.1 3060,2170 3090,2200 3230,2200 3260,2170 U1.3 3260,1540 3219.75,1499.75 C8.1 C21.1 3304.25,1430.25 3354.5,1380 U2.1
HIN(U): C28.1 R6.2 U3.7 | length 1841
  Top Layer w16: C28.1@7027.52,3145.03 7027.52,3197.52 7160,3330 7160,3795.36 7454.5,4089.85 U3.7 7661.29,4089.85 7710.15,4089.85 7889.29,3910.71 R6.2@7889.29,3700.41
HIN(V): C29.1 R7.2 U3.8 | length 1823.5
  Top Layer w16: C29.1 7127.52,3207.52 7185,3265 7185,3785 7426.86,4026.86 U3.8 7703.14,4026.86 7816.96,3913.04 7816.96,3613.05 7840,3590 R7.2
HIN(W): C30.1 R8.2 U3.9 | length 1717.1
  Top Layer w16: C30.1 7227.52,3737.52 7460,3970 7641.39,3970 U3.9 7647.52,3951.08 7795.96,3802.65 7795.96,3519.04 7835,3480 R8.2
ISO_5V: C16.2 C17.2 C18.2 D1.2 D3.2 J2.1 R5.2 U2.4 | length 3677.5
  Top Layer w32: U2.4 3455,1115 3521.5,1181.5 C16.2 C17.2@3880,1181.5 ; C17.2 3880,1280 3939.5,1339.5 C18.2 ; v1(6400,2722.25) D1.2 ; v1(7020,2390) D3.2 7024.63,2473.36 R5.2
  Bottom Layer w32: v1(6400,2722.25) 6400,2540 6550,2390 v1(7020,2390) 7020,1370 v1(6893.94,1243.94)
ISO_15V: C4.2 C9.2 C10.2 C15.2 C36.2 C37.2 C38.2 C39.2 C40.2 C42.1 C43.2 D2.2 J2.3 K1.3 R14.2 U1.6 U3.13 U4.2 U5.4 U6.8 | length 7212.5
  Top Layer w10: U3.13@7645.62,3710 U3.13
  Top Layer w16: R14.2 5480,2242.93 U6.8 5435.59,2244.41 5410,2270 5410,2630 5487.4,2707.4 U5.4
  Top Layer w32: U1.6 3560,2000 3673.31,1886.69 3673.31,1765.2 C9.2 C10.2 3880,1680 3950,1610 C15.2 ; v1(5390,2890) C42.1 5530,2890 ; U5.4 5538.25,2788.5 C43.2 5539.75,2880.25 5530,2890 ; K1.3 5577.89,3947.89 5509.5,3879.5 C4.2 5510,3509.5 5510,3470 5490,3450 5490,3417.99 D2.2 5490.49,3251.16 5540,3201.65 C36.2 5540,2990.5 C37.2 5540,2989.5 5540,2900 5530,2890 ; C40.2@5749.75,1669.68 C40.2 5899.75,1669.93 C39.2 C39.2@5906.69,1669.68 ; C39.2@5906.69,1668.11 C38.2 ; v1(6250,2680) 6253.75,2676.25 6507.71,2676.25 U4.2 ; v1(7450,2770) v1(7450,2970) ; v1(7450,3350) 7450,3430 7390,3490 7390,3660 7440,3710 U3.13@7645.62,3710
  Bottom Layer w32: v1(5390,2890) 5970,2890 6180,2680 v1(6250,2680) 6250,2730 6290,2770 v1(7450,2770) ; v1(7450,2970) v1(7450,3350)
ITRIP: C41.2 R14.1 U3.15 U6.1 | length 3241.6
  Top Layer w16: R14.1 5484.8,2154.8 5491.17,2154.8 5494.17,2157.8 5527.55,2157.8 C41.2 5541.78,2172.03 5541.78,2211.78 5574.41,2244.41 U6.1 7084.41,2244.41 7647.52,2807.52 U3.15
ITRIP+: C34.2 R12.1 U4.5 U6.3 | length 1461.3
  Top Layer w16: U6.3 5640.09,2295.5 5656.72,2295.5 5660.99,2291.23 5665.3,2291.23 5668.07,2288.46 6548.46,2288.46 6703.98,2443.98 U4.5
  Top Layer w32: U4.5 6787.11,2572.89 6800,2560 R12.1 6840.32,2618.93 C34.2
LIN(U): C31.1 R9.2 U3.10 | length 1727.3
  Top Layer w16: C31.1 7327.52,3202.48 7260,3270 7260,3730 7430.88,3900.88 U3.10 7653.02,3900.88 7774.96,3778.95 7774.96,3430.04 7835,3370 R9.2
LIN(V): C32.1 R10.2 U3.11 | length 1745.5
  Top Layer w16: C32.1 7427.52,3212.48 7290,3350 7290,3720 7407.89,3837.89 U3.11 7753.96,3731.45 7753.96,3326.04 7820,3260 R10.2
LIN(W): C33.1 R11.2 U3.12 | length 1754.1
  Top Layer w16: C33.1 7527.52,3202.48 7320,3410 7320,3710 7384.89,3774.89 U3.12 7653.02,3774.89 7732.96,3694.96 7732.96,3252.4 7835.35,3150 R11.2
NetB2_1: B2.1 B3.2 C1.2 C2.2 C3.2 K1.2 | length 4360.2
  Top Layer w10: B2.1@1200,3140.79 B2.1@1204.72,3145.51
  Top Layer w32: 1244.72,4284.72 1417.89,4457.89 C2.2 3200.43,4460.79 4607.09,4460.79 C3.2 4617.91,4455.79 5509.62,4455.79 K1.2
NetC4_1: C4.1 D2.1 K1.4 Q1.3 | length 904.4
  Top Layer w10: D2.1@5610,3422.01 D2.1 ; C4.1 C4.1@5620,3500 ; Q1.3@5669,3487.76 5669,3486 5675,3480 Q1.3
  Top Layer w32: D2.1@5610,3422.01 C4.1 ; C4.1@5620,3500 5656.76,3500 Q1.3@5669,3487.76 ; Q1.3 5688,3728 5907.89,3947.89 K1.4
NetC44_1: C44.1 C45.2 U5.6 U6.2 | length 483.3
  Top Layer w16: C45.2 5539.5,2310.5 5580,2270 U6.2
  Top Layer w32: U5.6 5538.25,2598.25 5504.17,2564.17 C44.1 5530,2500 5539.5,2490.5 C45.2
NetK1_1: K1.1 R1.2 | length 1128.8
  Top Layer w32: R1.2 6020,3720 6217.52,3917.52 K1.1
NetR1_1: R1.1 R2.1 R3.2 | length 259.3
  Top Layer w32: R1.1 R3.2 R2.1
NU_NV_NW_RS+: R13.2 U3.17 U3.18 U3.19 U4.1 | length 1103.8
  Top Layer w32: U4.1 6511.07,3092.43 R13.2 6521.54,3102.9 U3.17 U3.18 U3.19
OUT0: J6.1 R6.1 | length 501.1
  Top Layer w16: R6.1 8050,3700 8270,3920 J6.1
OUT1: J6.2 R7.1 | length 463.8
  Top Layer w16: R7.1 8140,3590 8270,3720 J6.2
OUT2: J6.3 R8.1 | length 419
  Top Layer w16: R8.1 8200,3480 8270,3550 J6.3
OUT3: J6.4 R9.1 | length 334.9
  Top Layer w16: R9.1 8110,3370 8170,3430 J6.4
OUT4: J6.5 R10.1 | length 322.4
  Top Layer w16: R10.1 8110,3260 8140,3230 J6.5
OUT5: J6.6 R11.1 | length 400.4
  Top Layer w16: R11.1 8220,3150 8270,3100 J6.6
OUT6: J6.7 Q1.1 R4.2 | length 2936.4
  Top Layer w32: Q1.1 5833.84,3442.5 5850,3458.66 R4.2 5851.88,3478.44 5907.65,3478.44 v1(5909.53,3476.56) ; v1(7910,2820) 7914.87,2820 7924.87,2830 J6.7
  Bottom Layer w32: v1(5909.53,3476.56) 5909.53,3250.47 6340,2820 v1(7910,2820)
P_VIN1: C5.2 D1.1 J5.1 R2.2 U3.23 | length 4630.3
  Top Layer w32: v1(6160,3610) R2.2 6200,3510 6210.25,3520.25 C5.2 6330.25,3520.25 6342.01,3532.01 D1.1 6400,4510 6457.22,4567.22 U3.23 ; v1(7734,2880) 7734,2526 7870,2390 J5.1@8276.79,2390
  Bottom Layer w32: v1(6160,3610) 6290,3610 6340,3560 6340,2980 6430,2890 7719.13,2890 v1@7724.56,2884.56
PGND: B3.1 BR1.1 C1.1 C2.1 C3.1 C5.1 C9.1 C10.1 C15.1 C16.1 C17.1 C18.1 C28.2 C29.2 C30.2 C31.2 C32.2 C33.2 C34.1 C35.1 C36.1 C37.1 C38.1 C39.1 C40.1 C41.1 C42.2 C43.1 C44.2 C45.1 J1.4 J2.2 J4.4 J5.4 J6.8 Q1.2 R3.1 R4.1 R13.1 U1.9 U2.3 U3.16 U4.4 U4.8 U5.1 U5.2 U6.4 | length 18038.1
  Top Layer w10: C36.1@5640,3080.5 C36.1 ; Q1.2@5770,3519.5 Q1.2 Q1.2@5773.09,3518.59
  Top Layer w32: 1540,3960 1644.19,4064.19 C2.1 3200.43,4067.09 4607.09,4067.09 C3.1 6040,4070 6121.79,3988.21 6121.79,3925.41 6120,3923.62 6120,3920 5850,3650 R4.1 5848.91,3518.59 Q1.2@5773.09,3518.59 ; U2.3 3455,1215 3520,1280 3610,1280 3680,1350 C16.1 ; U1.9 3856.56,2123.44 3836.56,2123.44 3790,2170 3530,2170 3500,2140 3500,1810 3680,1630 C9.1 C16.1 ; C10.1 C17.1 ; C15.1 C18.1 3900,1440 C17.1 ; C36.1@5640,3080.5 v1(5640,3180) ; C41.1 v1(5740,2170) ; v1(5740,2330) 5640,2330 C45.1 C44.2 5640,2630.85 U5.1 ; C40.1 5840.25,1569.43 5900,1509.68 C39.1 6042.99,1432.67 6081.57,1471.26 C38.1 ; Q1.2@5770,3519.5 v1(5770,3590) ; C5.1 6270,3314.17 R3.1 6274.17,3204.17 6150,3080 C36.1 5640.5,2990.5 C37.1 5637.91,2987.91 C42.2 5637.91,2792.34 C43.1 5651.4,2778.85 5671.15,2778.85 5690,2760 5690,2690 5670,2670 U5.2 U5.1 ; C35.1 6929.75,2719.75 C34.1 C34.1@6838.52,2721.23 ; J5.4 8329.39,1849.39 8329.39,2437.08 8270,2496.47 J6.8 ; J4.4 8270,4136.47 8329.39,4077.09 8329.39,3970.61 8330,3970 8330,2790 8270,2730 J6.8 ; C16.1 3878.5,1418.5 C17.1 ; U5.1 6053.17,2632.6 6112.89,2572.89 U4.4 6582.89,2572.89 6607.52,2597.52 6607.52,2697.52 6632.89,2722.89 U4.8 6836.86,2722.89 C34.1@6838.52,2721.23 ; C34.1@6838.52,2721.23 6838.52,3080 6846.41,3087.89 7027.52,3087.89 7028.95,3089.31 C29.2 7128.95,3087.89 C31.2 7328.95,3089.31 7579.31,3089.31 7600,3110 7600,3486.28 7581.25,3505.03 7531.56,3505.03 U3.16 7529.41,3569.1 7607,3646.69 7666.56,3646.69 7703.96,3609.29 7703.96,3240.39 7780,3164.34 7780,2870 8020,2630 J6.8
  Bottom Layer w32: v1(5640,3180) 5720,3180 5770,3230 v1(5770,3590) ; v1(5740,2170) v1(5740,2330)
U_VS(U): C22.1 C23.2 J4.1 U3.1 U3.22 | length 1999.2
  Top Layer w32: U3.22 6891,4381 7206.15,4696.15 U3.1 7647.52,4767.52 7707.91,4827.91 8048.48,4827.91 8056.33,4835.76 8056.33,4846.64 8079.68,4870 J4.1
V_VS(V): C24.1 C25.2 J4.2 U3.3 U3.21 | length 1976.6
  Top Layer w32: U3.21 6656.76,4330 6950,4330 7103.56,4483.56 U3.3 7706.66,4483.56 7742.3,4447.91 8050.94,4447.91 8056.96,4453.93 8056.96,4456.96 J4.2
VB(U): C22.2 C23.1 U3.2 | length 557.2
  Top Layer w10: C23.1@8012.04,4711.92 8012.04,4712.74 8028.8,4729.5 C23.1
  Top Layer w32: U3.2 7727.41,4617.41 7802.09,4692.09 C22.2 7992.21,4692.09 C23.1@8012.04,4711.92
VB(V): C24.2 C25.1 U3.4 | length 570.6
  Top Layer w32: U3.4 7714.87,4420.56 7823.35,4312.09 C24.2 8004.74,4312.09 C25.1
VB(W): C26.2 C27.1 U3.6 | length 664.8
  Top Layer w10: C27.1@8026.64,3987.39 C27.1
  Top Layer w32: U3.6 7716.29,4223.71 7937.52,4002.48 C26.2 7991.31,3952.06 C27.1@8026.64,3987.39
VFO_VIN3: J5.3 R5.1 U3.14 | length 3035.4
  Top Layer w32: R5.1 7103.32,2523.32 7186.68,2523.32 v1(7190,2520) 7290,2520 7530,2760 v1(7530,2970) ; U3.14 7527.67,3647.16 7477.16,3647.16 7447,3617 7447,3503 7530,3420 v1(7530,3350) ; v1(7910,1990) J5.3
  Bottom Layer w32: v1(7190,2520) 7190,2150 7350,1990 v1(7910,1990) ; v1(7530,2970) v1(7530,3350)
VIN2: C35.2 D3.1 J5.2 R12.2 | length 1754.2
  Top Layer w32: R12.2 6910,2560 6930,2580 C35.2 6941.76,2607.74 D3.1@7020,2607.74 ; D3.1 7022.01,2600 v1(7250,2600) ; v1(7910,2190) J5.2
  Bottom Layer w32: v1(7250,2600) 7250,2360 7420,2190 v1(7910,2190)
W_VS(W): C26.1 C27.2 J4.3 U3.5 U3.20 | length 2230.3
  Top Layer w32: U3.20 6799.69,4286.71 U3.5 7654.96,4279.27 7800.73,4279.27 7937.52,4142.48 C26.1 8048.4,4087.89 8054.16,4093.65 8054.16,4104.53 8210.61,4260.98 8210.61,4330.61 8270,4390 J4.3
~1: B4.2 B5.2 B7.2 BR1.2 C11.1 C12.1 C14.1 J1.3 | length 125.1
  Top Layer w10: B7.2@2219.07,2730.79 B7.2@2223.65,2735.37 ; C12.1@2589.68,2330.32 C12.1 C12.1@2630,2228.96
  Top Layer w32: B5.2@2512.39,1840 B5.2
~2: B4.1 B6.2 BR1.4 C11.2 C13.1 J1.1 | length 198.2
  Top Layer w10: B6.2@1561.28,1995.37 B6.2 ; B4.1@1563,2485.76 B4.1 B4.1@1574.79,2497.54 ; C11.2@2062.48,2928.64 2102.8,2968.96 C11.2 ; C13.1@2102.8,2228.96 C13.1
~3: B5.1 B6.1 BR1.3 C12.2 C13.2 J1.2 | length 61
  Top Layer w10: C13.2@2280,2228.96 C13.2
pads on no net: B1.2 B2.2 U1.7 U1.8 U3.24 U3.25 U3.26 U4.3 U4.6 U4.7 U5.3 U5.5 U6.5 U6.6 U6.7

## Text inside footprints (layer, text, board x,y; h text height)
BR1: Top Overlay "*" at 2468.05,1505 h50 r180; Mechanical 13 "*" at 2418.05,1505 h50 r180
U2: Top Overlay "*" at 3430,1509.5 h50 r270; Mechanical 13 "*" at 3430,1459.5 h50 r270
U5: Top Overlay "*" at 5669,2608.6 h50 r180; Mechanical 13 "*" at 5622,2666 h50 r180